# EAGLE board fluke845_refboard (EAGLE 7.4.0)
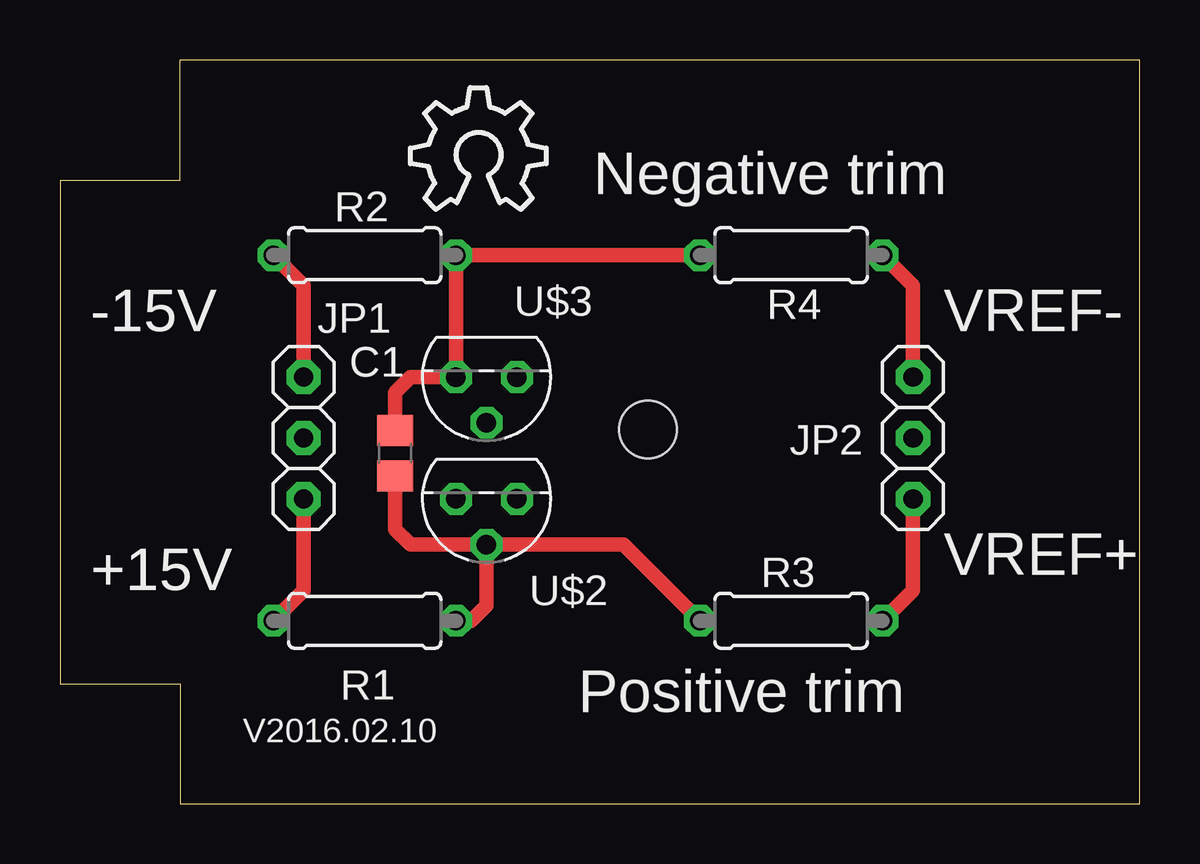
[diagram p0: board, top side]
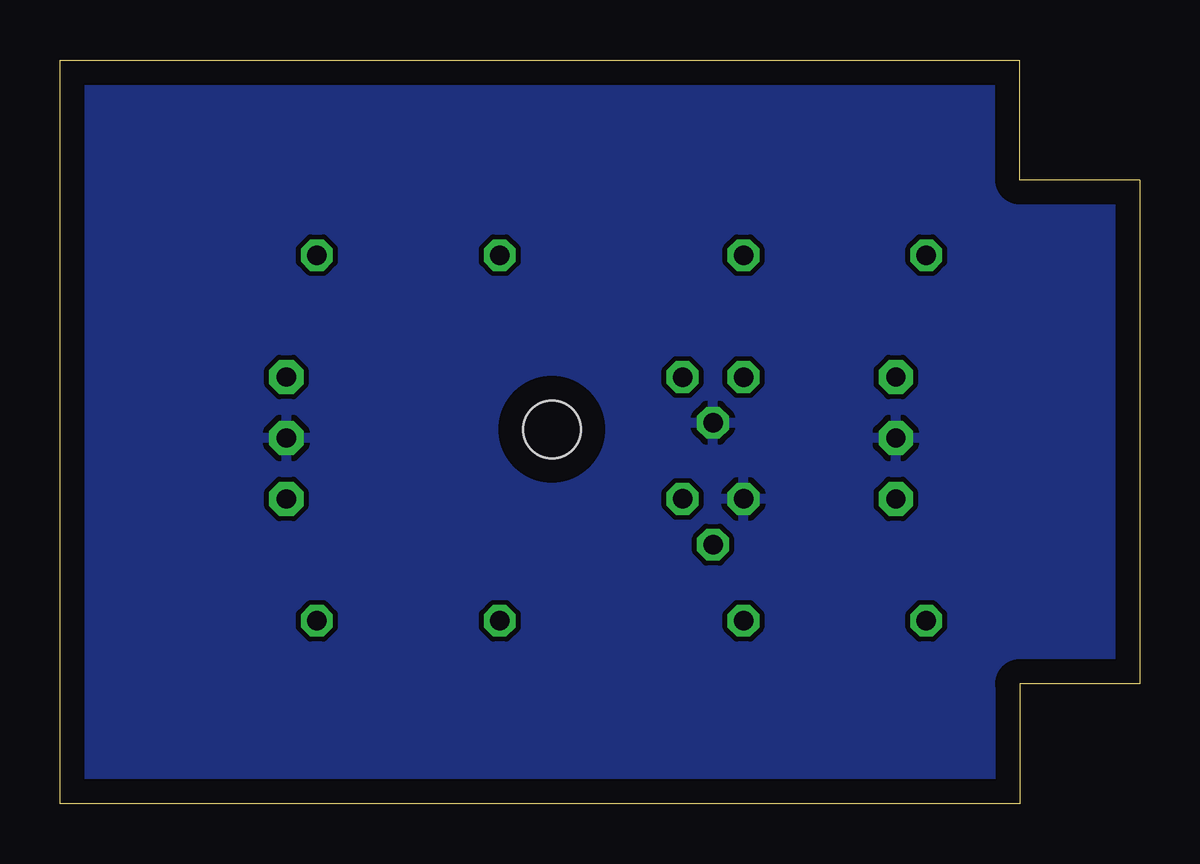
[diagram p1: board, bottom side, seen from below]

Size 45 x 31 mm. Coordinates in mm from the lower left corner, seen from the top.
Copper layers (1*16): Top 0.035mm / dielectric 1.5mm / Bottom 0.035mm
Design rules "default": minimum track width 10mil, minimum drill 24mil, track to track 8mil, track to pad 8mil, pad to pad 8mil, via to via 8mil, smd to smd 8mil, copper to edge 40mil, drill to drill 8mil, minimum pad ring 10mil, minimum via ring 8mil, stop-mask expansion 4mil, vias tented up to drill 0mil, thermal gap 10mil

## Footprints (pad centres in the part's own frame; a part is rotated, then mirrored left to right if it is on the bottom)
C0805 = smd 1.3 x 1.5: 1 -0.95,0; 2 0.95,0
1X03_SMALL = drill 0.8 pad 1.422 octagon: 1 -2.54,0; 2 0,0; 3 2.54,0
0207/7 = drill 0.813 octagon: 1 -3.81,0; 2 3.81,0
SUPERTRONIC_37_51MM = hole 2.4: 24.5,15.6
TO92 = drill 0.813 octagon: 1 1.27,0; 2 0,1.905; 3 -1.27,0

## Placement (x,y rotation side)
C1  10u  [C0805]  13.97,14.61 90 top
JP1  [1X03_SMALL]  10.16,15.24 90 top
JP2  [1X03_SMALL]  35.56,15.24 90 top
LOGO1  OSHW_LOGO_8MILX0200-NT  [OSHW_8X200_NOTEXT]  14.61,24.77 0 top
R1  33k  [0207/7]  12.7,7.62 180 top
R2  33k  [0207/7]  12.7,22.86 0 top
R3  CALCULATE  [0207/7]  30.48,7.62 0 top
R4  CALCULATE  [0207/7]  30.48,22.86 180 top
U$1  SUPERTRONIC37_51  [SUPERTRONIC_37_51MM]  0,0 0 top
U$2  LT1004  [TO92]  17.78,12.7 180 top
U$3  LT1004  [TO92]  17.78,17.78 180 top

## Library data of the parts
C1 R1-R4 = SquantorRCL
JP1 JP2 = SquantorConnectors
LOGO1 = ohw-logo
U$1 = SquantorPCBOutline
U$2 U$3 = SquantorLinearTechnology

## Nets
+15V: JP1.1 R1.2
-15V: JP1.3 R2.1
GND: JP1.2 JP2.2 U$2.1 U$3.2
N$1: C1.2 R2.2 R4.2 U$3.1
N$2: C1.1 R1.1 R3.1 U$2.2
VREF+: JP2.1 R3.2
VREF-: JP2.3 R4.1

## Tracks (layer width: path | path; a pad name or v marks a point on that pad's centre or on a via)
+15V
  Top 0.61: JP1.1 10.16,8.89 R1.2
-15V
  Top 0.61: JP1.3 10.16,21.59 R2.1
GND
  pour Bottom: 0,5.08 5.08,5.08 5.08,0 45.72,0 45.72,31.75 5.08,31.75 5.08,26.67 0,26.67
N$1
  Top 0.61: C1.2 13.97,17.14 14.61,17.78 U$3.1 R2.2 R4.2
N$2
  Top 0.61: R1.1 17.14,7.62 17.78,8.26 U$2.2 | U$2.2 14.61,10.79 13.97,11.43 C1.1 | U$2.2 23.5,10.79 R3.1
VREF+
  Top 0.61: R3.2 35.56,8.89 JP2.1
VREF-
  Top 0.61: R4.1 35.56,21.59 JP2.3

## Text on the board
tPlace: Negative trim | -15V | VREF- | VREF+ | +15V | Positive trim | V2016.02.10